# Altium PCB MCORD_AFE.PCBDOC (part 3 of 3)
Units mil, origin at the board's own origin, x right, y up, seen from the top; angles counter-clockwise.
Board outline 2755.91 x 787.4 mil, 4 copper layers (TOP, G1, PWR, BOT), stack 58.685 mil thick; 135 components, 89 nets, 442 pads, 254 vias.
Unrouted connection lines stored in the file: 2.
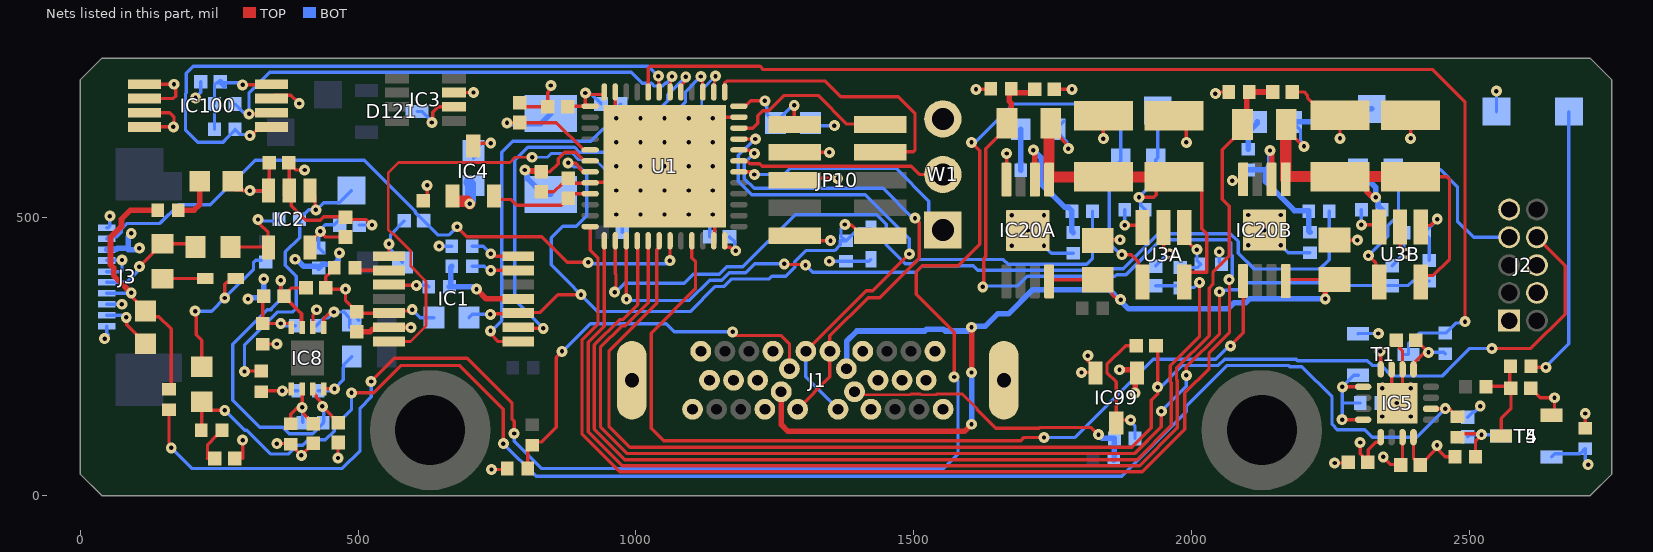
[diagram p4: the nets of this part, all layers, seen from the top]

## Via types
v1: diameter 19.68, hole 7.87, TOP to BOT, tented both sides, 254 vias

## Nets (pads, with @x,y where several pads share a name; then routed paths per layer and width w, separated by ;. In a path a pad name is that pad's centre, name@x,y a point inside that pad or via, vN(x,y) a via of type N, cw(c..) or ccw(c..) an arc to the next point about the centre after c; other vN are vias at no path point) (continued)
EN_HV1: IC20B.5 U1.21 | length 1621.4
  TOP w6: U1.21@1100.73,458.71 1100.73,428.36 1107.09,422 1107.09,372.57 1027.28,292.76 1027.28,121.52 1049.65,99.15 1692.51,99.15 1698.2,104.84 v1(1734.09,104.84) ; v1(2069.62,269.43) 2069.62,270.16 2092.36,292.9 IC20B.5@2092.36,386.36
  BOT w6: v1(1734.09,104.84) 1790,104.84 1930.53,245.38 2043.47,245.38 2067.53,269.43 v1(2069.62,269.43)
GND: C1.1 C2.1 C3.1 C4.1 C5.1 C6.1 C16.1 C26.1 C42.1 C43.1 C44.1 C45.1 C46.1 C48.1 C49.1 C54.1 C92.1 C93.1 C94.1 C95.1 C97.1 C98.1 C101.1 C130A.1 C130B.1 C131A.1 C131B.1 C132A.1 C132B.1 C133A.1 C133B.1 C134A.1 C134B.1 C284.1 C285.1 C286.1 C290.1 C291.1 C292.1 D121.3 IC1.1 IC1.5 IC2.2 IC3.2 IC4.3 IC5.7 IC5.14 IC5.15 IC5.17 IC8.6 IC20A.4 IC20A.9 IC20B.4 IC20B.9 IC99.3 IC100.1 IC100.2 IC100.3 IC100.4 IC100.7 J1.A1 J1.A12 J1.B1 J1.B12 J1.G1 J1.G2 J1.G3 J1.G4 J1.G5 J1.G6 J1.SHIELD J2.1 J2.4 J2.6 J3.1 J3.4 J3.5 J3.8 J3.9 J3.10 JP10.3 JP10.5 JP10.9 R3.1 R5.1 R6.1 R18.1 R19.1 R63.2 R67.2 R86A.1 R86B.1 R88A.2 R88B.2 R105.1 R107.1 R154A.1 R154B.1 T1.2 T4.2 T5.2 TP44.1 U1.8 U1.23 U1.35 U1.47 U1.49 U3A.2 U3B.2 W1.3 | length 4813
  TOP w6: v1(83,321) 83.93,320.07 83.93,307.29 C95.1@117.74,273.48 ; IC100.4@115.83,663.61 v1(167.81,663.61) 168.98,664.78 168.98,681.15 160.92,689.2 IC100.3@115.83,689.2 ; IC100.2@115.83,714.8 167.81,714.8 171.92,718.91 v1@171.92,731.75 ; IC100.1@115.83,740.39 v1(168.98,740.39) ; 291.79,67 292.44,67.65 v1(292.44,100) ; R107.1@328.79,272.82 328.94,272.97 v1(353.99,272.97) ; IC100.7@344.17,714.8 350.03,720.65 379.35,720.65 v1(394.26,705.74) ; v1(353.99,93.87) 376.7,93.87 378.57,92 R105.1@379.11,92.54 379.11,91.65 384.68,86.08 v1(398,72.76) C97.1@419.11,93.87 ; v1(404,586) 388.7,586 C98.1@375.61,599.09 376.39,598.31 IC2.2@376.39,548.9 380.06,545.23 380.06,521.76 406.21,495.61 431.99,495.61 438.14,501.77 C44.1@468.39,501.77 ; IC8.6@418.95,302.63 418.95,324.35 425.58,330.98 v1(425.58,334.68) v1@428.2,337.3 ; C93.1@441.9,373.92 441.9,394.4 445.41,397.92 446.2,397.92 457.5,409.21 R6.1@457.5,410 ; C93.1@442,367 446.74,371.74 v1(477.53,371.74) 477.53,351.18 C2.1@498,330.72 500.07,328.65 IC1.5@555.86,328.65 559.51,332.3 594.98,332.3 v1(597.6,334.91) ; v1(464.03,67.92) 464.03,95.25 C94.1@464.23,95.44 ; C44.1@477.53,501.02 481.55,497 515.26,497 v1(525.21,487.05) ; IC1.1@555.86,431.01 v1(555.86,453.27) ; C42.1@617,530.72 624.51,538.23 v1(624.51,558.39) ; v1(632.82,671.49) 634.64,673.31 634.64,690.33 644.13,699.82 IC3.2@672.36,699.82 ; IC4.3@707.33,629.54 711.69,633.9 738.17,633.9 v1(738.79,634.52) ; v1(740.24,47.15) R19.1@760.78,47.15 ; R19.1@768.41,49.08 R19.1@768.41,49.87 ; C4.1@793.67,709.69 C4.1@790.91,706.92 798.05,699.78 C292.1@841.54,699.78 841.54,725.6 844.38,728.44 844.38,735.38 v1(847,738) ; C26.1@829.47,547.1 852.56,547.1 867.09,561.64 868.8,561.64 C16.1@878,570.84 886.83,562.01 903.09,562.01 903.38,562.3 916.93,562.3 U1.8@917.66,563.04 918.35,563.73 944.83,563.73 U1.49@973.66,592.57 ; U1.47@962.94,726.43 962.94,681.15 v1(964.91,679.18) v1(1008.21,635.87) v1(1051.52,592.57) ; U1.49@969.28,588.19 U1.49@973.66,592.57 ; U1.23@1140.1,458.71 1140.84,459.44 1140.84,472.99 1141.81,473.96 1141.81,502.28 v1(1138.13,505.95) v1(1094.83,549.26) v1(1051.52,592.57) ; U1.35@1185.38,681.15 1140.1,681.15 v1(1094.83,635.87) v1(1051.52,592.57) ; JP10.9@1285.69,467.84 1289.45,471.61 1302.06,459 v1(1350,459) ; JP10.5@1285.69,567.84 1288.8,570.96 v1(1362.81,570.96) ; JP10.3@1285.69,617.84 v1(1347.96,617.84) ; v1(1611.86,731.11) 1636.99,731.11 R154A.1@1638.21,732.33 ; IC20A.4@1666.57,568.8 1667.01,569.24 v1(1667.01,615.67) ; C134A.1@1752.97,731.11 v1(1784.46,731.11) ; C130A.1@1795.65,691.09 1802.95,683.79 C130A.1@1840.96,683.79 v1(1840.96,642.45) ; C132A.1@1830.96,459.35 1832.61,461 1833,460.61 v1(1870.84,460.61) ; v1(1890.01,136.31) 1869.58,136.31 IC99.3@1864,130.72 1864,204.67 1847.39,221.28 1847.39,236.17 1881.07,269.84 C3.1@1900.21,269.84 ; U3A.2@1948.96,482.67 1949.59,482.04 1949.59,445.69 v1(1959.85,435.43) ; C131A.1@1967.96,683.79 1990.37,661.38 v1(1990.37,635.87) ; v1(2042.61,723.41) 2042.61,722.72 2046.31,726.43 R154B.1@2066.65,726.43 ; v1(2073,567) 2089.93,567 IC20B.4@2092.36,569.43 ; C134B.1@2180.79,726.43 2201.99,726.43 2208.11,720.3 2208.11,716.48 2240.17,684.42 C130B.1@2266.75,684.42 v1(2266.75,643.08) ; C132B.1@2256.75,459.98 2256.89,459.84 v1(2297.98,459.84) ; v1(2257,59) 2279.96,59 C101.1@2281.15,60.19 ; v1(2344.54,69.97) 2358.32,56.19 2375.14,56.19 C46.1@2376.01,55.32 2379.26,58.57 IC5.7@2379.26,105.41 ; IC5.15@2359.58,227.45 2359.58,176.27 IC5.17@2369.42,166.43 2379.26,176.27 IC5.14@2379.26,227.45 2379.26,260.39 2374.5,265.15 C48.1@2374.5,285.39 ; U3B.2@2374.75,483.3 2375.38,482.67 2375.38,446.32 v1(2385.64,436.05) ; v1(2393.75,643.08) C131B.1@2393.75,684.42 ; C45.1@2609.72,193.72 2627.16,176.27 v1(2652.58,176.27) 2652.58,150.11 T4.2@2647.25,144.78 ; v1(2708,148) 2708,121.75 R63.2@2708.21,121.54 ; U1.49@973.66,592.57 v1(1008.21,592.57) v1(1051.52,592.57)
  BOT w6: v1(44.13,282.58) 44.13,283.09 50.41,289.37 47.69,292.09 J3.10@47.69,305.12 ; J3.9@47.69,324.8 75.5,324.8 79.3,321 v1(83,321) ; J3.8@47.69,344.49 v1(75.16,344.49) ; J3.5@47.69,403.15 73.23,403.15 75.5,405.41 v1(75.5,424.25) 74.98,423.74 48.21,423.74 J3.4@47.69,423.23 ; J3.1@47.69,482.28 50.69,482.28 53.6,485.19 v1(53.6,502.95) ; v1(207.55,716) 207.55,716.61 216.78,725.84 C284.1@216.78,745.19 ; C92.1@502.24,487.05 v1(525.21,487.05) ; C6.1@579.89,419.85 579.89,420.83 558.48,442.25 558.48,450.65 v1(555.86,453.27) 558.48,455.89 558.48,469.81 C5.1@583.05,494.38 ; v1(597.6,334.91) 612.11,320.4 C1.1@636.55,320.4 ; D121.3@606.06,691.46 614.91,691.46 632.82,673.55 v1(632.82,671.49) ; v1(645.84,449) R3.1@668.5,449 ; C285.1@707.69,607.44 716.89,616.65 716.89,628.89 722.52,634.52 v1(738.79,634.52) ; v1@962.45,635.87 v1(964.91,635.87) ; v1(964.91,505.95) 964.91,505.77 975.1,495.57 C43.1@975.1,474.36 ; v1(964.91,679.18) 964.91,697.11 C291.1@972.62,704.82 ; C290.1@1132.88,466.1 1132.88,497 1138.13,502.25 v1(1138.13,505.95) ; v1(1138.13,679.18) v1@1141.81,679.18 ; C286.1@1314.06,670.53 1314.54,671 1319.66,665.87 v1(1356.93,665.87) ; v1(1734.09,450.1) 1747.63,436.57 R86A.1@1786.96,436.57 ; v1(1890.01,136.31) 1890.01,132.6 1897.96,124.65 R18.1@1897.96,103.03 ; C133A.1@1934.96,413.38 1935.16,413.38 1946.13,424.35 1946.13,424.55 1957.01,435.43 v1(1959.85,435.43) ; v1(2049.5,439) 2049.5,420.17 R88A.2@2053.56,416.12 ; v1(2159.88,450.73) 2173.42,437.2 R86B.1@2212.75,437.2 ; T1.2@2299.26,291.55 2299.68,291.96 v1(2335.84,291.96) ; v1(2342.99,142.65) v1(2342.99,193.72) ; C133B.1@2360.75,414.01 2360.95,414.01 2371.92,424.98 2371.92,425.18 2382.8,436.05 v1(2385.64,436.05) 2385.64,439.76 2381.84,443.56 R88B.2@2381.84,472.87 ; C49.1@2496.23,141.42 2505.43,150.62 2508.46,150.62 v1(2518.99,161.16) ; TP44.1@2548.14,691.09 v1(2548.14,727.91) ; T5.2@2647.25,69.97 2652.94,75.67 2698.56,75.67 2707.42,84.53 R67.2@2708.21,84.53 2708.21,64.5 2713.01,59.7 v1(2713.01,56)
  other v1: 2393.99,142.65 2368.97,166.88 2393.99,193.72 1675.83,450.1 2101.61,450.73 1704.96,477.27 2130.75,477.9 1675.83,504.43 1734.09,504.43 1008.21,505.95 1051.52,505.95 1094.83,505.95 2101.61,505.06 2159.88,505.06 964.91,549.26 1008.21,549.26 1051.52,549.26 1138.13,549.26 964.91,592.57 1094.83,592.57 1138.13,592.57 1051.52,635.87 1138.13,635.87 1008.21,679.18 1051.52,679.18 1094.83,679.18
I_SIPM_MEAS0: C133A.2 R68A.2 U1.16 | length 1825.4
  TOP w6: U1.16@1002.31,458.71 1003.04,457.98 1003.04,343.99 976.05,317 970.79,317 925.13,271.34 925.13,120 980.12,65 1901.55,65 1963.12,126.56 1963.12,203.2 1961.52,204.79 1961.52,234.16 2014,286.63 v1(2014,384)
  BOT w6: C133A.2@1934.96,377.55 1975.57,377.55 R68A.2@1979.39,373.73 1980.29,374.63 2003.64,374.63 2013.01,384 v1(2014,384)
I_SIPM_MEAS1: C133B.2 R68B.2 U1.17 | length 2097.4
  TOP w6: U1.17@1021.99,458.71 1021.99,347.39 980.61,306 975.34,306 936.13,266.78 936.13,124.55 984.68,76 1897,76 1945.27,124.28 v1(1945.27,152) ; v1(1990.37,216.54) 1990.37,231.7 2050,291.33 v1(2050,367)
  BOT w6: v1(1945.27,152) 1990.37,197.09 v1(1990.37,216.54) ; v1(2050,367) 2052.62,369.62 2064.75,369.62 2066.06,370.92 2084.76,370.92 2096.82,382.99 2274.9,382.99 2279.49,378.39 2360.75,378.39 2389.81,378.39 2397.78,386.36 R68B.2@2427.36,386.36
NetC4_2: C4.2 Q1.1 U1.5 | length 310.9
  TOP w6: C4.2@790.91,671.49 799,663.39 C4.2@791.39,671 ; U1.5@917.66,622.09 905.79,622.09 856.89,671 C4.2@791.39,671 ; C4.2@791.39,671 v1(768,671) C4.2@791.39,671
  TOP w10: C4.2@790.91,671.49 C4.2@796.5,677.09
  BOT w10: v1(768,671) 769.85,669.15 828.4,669.15 Q1.1@847,687.75
NetC26_2: C26.2 Q1.2 U1.6 | length 216.6
  TOP w6: C26.2@829.47,582.54 845.12,582.54 860.16,597.58 860.16,606.39 871.61,617.84 891.4,617.84 906.83,602.41 U1.6@917.66,602.41
  TOP w10: v1(800.08,586) 801.81,584.27 827.74,584.27 C26.2@829.47,582.54
  BOT w10: v1(800.08,586) 800.08,583.38 804.76,578.7 804.76,570.54 833.22,542.08 Q1.2@847,542.08
NetC44_2: C44.2 C92.2 IC2.5 L1.1 | length 165.9
  TOP w6: IC2.5@413.8,446.54 413.8,456.38 432.39,474.98 v1(432.39,475.77) ; v1@432.39,473.91 440.76,465.55 C44.2@468.39,465.55
  BOT w6: L1.1@438.61,436.71 438.61,437.1 429.79,445.92 L1.1@429.4,445.92 429.4,469.07 432.39,472.06 v1(432.39,475.77) 432.39,479.47 440.72,487.8 457.39,487.8 C92.2@466.59,497
NetC45_2: C45.2 R7.1 R110.1 T4.3 | length 177.3
  TOP w6: R110.1@2529.5,195.96 2530.29,196.75 C45.2@2572.23,196.75 ; T4.3@2556.7,107.38 2556.7,139 2574.28,156.59 C45.2@2574.28,193.72 2572.23,195.77 2572.23,231.74 R7.1@2573.5,233
NetC49_2: C49.2 R8.1 R66.1 T5.3 | length 153.7
  TOP w6: R66.1@2478.12,105.2 2484.39,111.47 2519.56,111.47 v1(2521.18,109.85) 2510.57,99.24 2510.57,70.07 R8.1@2510.5,70
  BOT w6: C49.2@2496.23,105.99 2500.09,109.85 v1(2521.18,109.85) 2554.22,109.85 T5.3@2556.7,107.38
NetC54_2: C54.2 R71.1 | length 62.5
  TOP w6: 228.8,67 229.24,67.44 229.24,92.17 245.97,108.91 246.76,108.91 255.17,117.32 R71.1@255.17,118.11
NetC93_2: C93.2 C94.2 IC8.3 IC8.7 L6.1 R46.2 R49.2 | length 782.1
  TOP w6: v1(361,387.58) 361,359.11 R46.2@366.98,353.13 ; R46.2@366.98,359.07 366.98,355.05 370.22,355.05 R46.2@375.4,349.87 ; 395.79,329.48 R46.2@375.4,349.87 ; 397.35,322.76 397.35,304.55 IC8.7@399.27,302.63 399.27,322.76 ; 397.38,324.65 399.27,322.76 ; C93.2@406.46,373.92 381.05,373.92 373.68,366.56 373.68,351.59 R46.2@375.4,349.87 ; IC8.3@418.95,192.39 418.95,185.5 420.87,183.58 421.2,183.58 424.72,180.07 424.72,176.85 v1@438.28,163.29 ; v1(435.77,160.77) 453.05,143.49 453.05,142.64 464.03,131.66 C94.2@464.23,131.66 ; R46.2@375.4,349.87 375.94,349.87 378.59,347.22 379.61,346.2 381.66,344.15 388.88,336.93 390.01,335.8 392.49,333.32 393.6,332.21 396.06,329.75 399.27,326.54 399.27,322.76
  BOT w6: v1(361,387.58) 361,364.27 L6.1@366.59,358.68 ; L6.1@366.59,359.07 L6.1@366.59,358.68 ; v1(435.77,160.77) 435.77,157.07 438.61,154.24 438.61,133.44 437.61,132.45 R49.2@437.61,131.66 437.61,130.88 418.2,111.46 376.32,111.46 364.8,122.97 322.92,122.97 274.47,171.43 274.47,272.82 336.45,334.81 344.27,334.81 344.27,336.36 L6.1@366.59,358.68
NetC96_1: C96.1 C98.2 IC2.3 R106.1 | length 163.3
  TOP w6: C96.1@274.47,565.94 274.47,553.13 277.35,550.24 292.44,550.24 293.68,549 v1(305.53,549) 338.89,549 IC2.3@338.99,548.9 340.17,550.08 C98.2@340.17,599.09
  BOT w6: v1(305.53,549) 338.89,549 R106.1@338.99,548.9
NetC96_2: C96.2 R104.2 | length 84.8
  TOP w10: R104.2@176.83,513.78 205.17,513.78 215.41,524.01 C96.2@215.41,565.94
NetC97_2: C97.2 IC8.2 R49.1 R105.2 | length 141.4
  TOP w6: R105.2@379.11,129.55 379.11,146.87 388.78,156.54 396.81,156.54 v1(399.42,159.16) ; IC8.2@399.27,192.39 399.42,192.24 v1(399.42,159.16) ; C97.2@419.11,130.09 418.91,130.09 407.94,141.07 407.94,141.26 402.04,147.16 402.04,156.54 v1(399.42,159.16)
  BOT w6: v1(399.42,159.16) 400.61,157.98 R49.1@400.61,131.66
NetC99_1: C99.1 IC5.10 R66.2 R71.2 | length 2780.2
  TOP w6: R71.2@218.17,118.11 218.95,118.9 C99.1@218.95,169.29 234.66,153.59 239.11,153.59 239.15,153.54 v1(260.29,153.54) ; v1(488.32,185.02) 528.31,185.02 577.67,234.38 682.46,234.38 761.39,155.44 v1(761.39,93.87) ; IC5.10@2430.44,156.59 v1(2456.03,156.59) 2463.74,156.59 2468.91,151.41 2468.91,150.62 2477.33,142.21 R66.2@2478.12,142.21
  BOT w6: v1(260.29,153.54) 295.99,117.84 299.83,117.84 342.46,75.22 375.22,75.22 390.61,90.6 401,90.6 410.86,100.46 441.34,100.46 457.03,116.15 457.03,124.57 488.32,155.86 v1(488.32,185.02) ; v1(761.39,93.87) 820.35,34.91 1874.29,34.91 1990.37,150.98 1990.37,161.16 2063.59,234.38 2174.14,234.38 2176.57,231.95 2198.11,231.95 2252.33,177.72 2252.33,128.65 2261.95,119.04 2311.05,119.04 2324.68,105.41 2404.85,105.41 v1(2456.03,156.59)
NetC99_2: C99.2 D2.2 R51.1 | length 315.6
  TOP w6: v1@209.11,330.61 209.11,289.28 218.95,279.43 C99.2@218.95,232.28 ; v1(260.29,355.85) 260.29,380.63 263.81,384.14 273.15,384.14 D2.2@279.99,390.98
  BOT w6: v1(207,332) 236.44,332 v1(260.29,355.85) 312,407.56 312,420 316,424 R51.1@326,424
NetC130A_2: C130A.2 C131A.2 IC20A.1 R85A.2 R94A.2 R152A.2 R153A.2 TP5A.1 U3A.5 | length 968.5
  TOP w6: R94A.2@1738.52,668.31 1753.23,653.6 1754.45,653.6 1777.97,630.08 v1(1777.97,624.54) ; v1(1905,537) 1931.41,537 1935.9,541.49 1935.9,549.98 1959.47,573.55 C131A.2@1967.96,573.55 1994.53,573.55 2018.11,549.98 2018.11,480.37 2027.16,471.32 2027.16,401.84 1999.8,401.84 1986.36,388.4 U3A.5@1986.36,384.24
  TOP w20: IC20A.1@1743.35,568.8 IC20A.1@1743.35,572.41 ; R94A.2@1746.46,651.27 1743.35,648.16 IC20A.1@1743.35,572.41 ; C131A.2@1959.47,573.55 C130A.2@1840.96,573.55 1744.49,573.55 IC20A.1@1743.35,572.41
  BOT w6: R153A.2@1769.55,673.57 R153A.2@1755.27,659.28 1755.27,657.31 1775.35,637.23 1775.35,627.16 v1(1777.97,624.54) ; R85A.2@1916.46,514.27 1908.05,522.68 1908.05,530.25 1905,533.3 v1(1905,537) 1935.45,567.45 R152A.2@1935.45,604.72 1939,608.27 TP5A.1@1939,693
NetC130B_2: C130B.2 C131B.2 IC20B.1 R85B.2 R94B.2 R152B.2 R153B.2 TP5B.1 U3B.5 | length 1005.4
  TOP w6: R94B.2@2162.24,667.84 2162.24,665.87 2176.96,651.16 2178.17,651.16 v1@2203.76,625.57 ; C131B.2@2393.75,574.18 2458.36,574.18 2463.74,568.8 2463.74,425.86 2434,396.12 2421.95,396.12 2412.15,386.33 U3B.5@2412.15,384.87
  TOP w10: C130B.2@2266.75,574.18 2293.32,574.18 2314.9,552.61 2314.9,547.7 2323.75,538.85 2329.15,538.85 v1(2331,537)
  TOP w20: IC20B.1@2169.13,569.43 IC20B.1@2169.13,573.04 ; R94B.2@2172.24,651.9 2169.13,648.79 IC20B.1@2169.13,573.04 ; C130B.2@2266.75,574.18 2170.28,574.18 IC20B.1@2169.13,573.04 ; C130B.2@2293.32,574.18 C131B.2@2393.75,574.18
  BOT w6: R153B.2@2181.05,672.5 2195.77,657.78 2195.77,638.48 2201.88,632.37 v1(2201.88,628.67)
  BOT w10: R153B.2@2181.05,672.5 2225.16,672.5 2248.66,696 TP5B.1@2324,696 ; R152B.2@2299.26,586.69 2299.26,584.72 2311.98,572 2313.95,572 2331,554.95 v1(2331,537) 2331,534.38 2335.84,529.54 2335.84,521.31 R85B.2@2342.25,514.9
NetD2_1: D2.1 R29.1 | length 77.2
  TOP w6: R29.1@148,390.28 148.71,390.98 D2.1@224.87,390.98
NetIC1_2: IC1.2 R6.2 | length 63.3
  TOP w6: R6.2@494.5,410 499.09,405.42 IC1.2@555.86,405.42
NetIC1_3: IC1.3 R4.1 | length 73.6
  TOP w6: IC1.3@555.86,379.83 557.15,378.54 v1(604.98,378.54)
  BOT w6: v1(604.98,378.54) 605.43,378.98 624.51,378.98 R4.1@627.5,376
NetIC1_13: IC1.13 R2.1 | length 85.8
  TOP w6: v1(738.79,405.42) IC1.13@788.14,405.42
  BOT w6: R2.1@705.5,413 727.5,413 735.08,405.42 v1(738.79,405.42)
NetIC1_14: IC1.14 R3.2 | length 90.1
  TOP w6: v1(738.79,435.43) 742.49,435.43 746.91,431.01 IC1.14@788.14,431.01
  BOT w6: R3.2@705.5,449 725.22,449 v1(738.79,435.43)
NetIC2_1: IC2.1 R47.1 R101.2 TP4.1 | length 532.2
  TOP w6: v1(295.73,223.54) 296.51,224.33 R47.1@326.11,224.33 ; IC2.1@413.8,548.9 422.61,540.09 422.61,516.02 v1(424.18,514.45)
  BOT w6: v1(295.73,223.54) 295.73,270.7 355.64,330.61 382.93,330.61 388.8,336.49 388.8,394.96 369.16,414.61 369.16,438.63 394.9,464.37 R101.2@394.9,497.72 394.9,498.5 403.31,506.92 404.1,506.92 411.63,514.45 v1(424.18,514.45) 425.21,514.45 438.02,527.26 466.32,527.26 TP4.1@488.32,549.26
NetIC2_4: IC2.4 R101.1 R102.2 | length 166
  TOP w6: R102.2@270.54,447.44 IC2.4@338.09,447.44 ; v1(320.13,497) 322.75,494.38 322.75,489.25 338.09,473.91 IC2.4@338.09,447.44 ; IC2.4@338.99,446.54 338.39,447.13 IC2.4@338.09,447.44
  BOT w6: v1(320.13,497) 322.75,494.38 354.55,494.38 R101.1@357.89,497.72
NetIC5_1: IC5.1 IC5.4 R5.2 T1.1 | length 204
  TOP w6: v1(2270.53,136.88) IC5.4@2308.39,136.9 ; v1(2270.99,195.96) IC5.1@2308.39,195.96
  BOT w6: v1(2270.53,136.88) 2270.76,137.11 2270.76,166.42 ; T1.1@2299.26,216.74 2291.39,216.74 2270.99,196.35 v1(2270.99,195.96) 2270.76,195.73 2270.76,166.42 ; R5.2@2302.96,166.88 2271.22,166.88 2270.76,166.42
NetIC8_1: IC8.1 R45.1 R47.2 | length 84.2
  TOP w6: R47.2@326.11,187.32 327.6,188.81 v1(364.01,188.81) 377.66,188.81 379.58,190.73 IC8.1@379.58,192.39
  BOT w6: v1(364.01,188.81) R45.1@391.59,188.81
NetIC8_4: IC8.4 R45.2 R48.1 | length 120.7
  TOP w6: IC8.4@438.64,192.39 v1(457.73,192.39)
  BOT w6: R45.2@428.61,188.82 450.46,188.82 454.03,192.39 v1(457.73,192.39) 473.61,208.27 473.61,230.32 474.2,230.91 474.2,235.8 R48.1@488.91,250.52
NetIC8_5: IC8.5 R50.2 R103.1 | length 133.9
  TOP w6: IC8.5@438.64,302.63 438.64,318.64 450.61,330.61 v1(456.53,330.61)
  BOT w6: R50.2@424.61,305.82 438.98,320.19 446.11,320.19 v1(456.53,330.61) ; v1@456.54,330.61 474.2,330.61 485.15,319.65 R103.1@485.15,303.26 ; R103.1@499.6,317.48 R103.1@501.91,315.17
NetIC8_8: IC8.8 R46.1 R50.1 R107.2 | length 134.9
  TOP w6: R46.1@329.98,359.07 328.79,357.89 R107.2@328.79,309.83 v1(361,309.83) 377.66,309.83 379.58,307.91 IC8.8@379.58,302.63
  BOT w6: v1(361,309.83) 363.18,309.83 367.19,305.82 R50.1@387.61,305.82
NetIC20A_2: IC20A.2 R11A.1 R86A.2 R87A.2 | length 237.9
  TOP w10: v1(1714.96,621.74) 1714.96,619.12 1717.75,616.32 IC20A.2@1717.75,568.8
  BOT w10: v1@1713.41,620.19 v1(1714.96,621.74) 1729.28,607.42 R11A.1@1729.28,586 1729.28,561.32 1771.79,518.8 1778.04,518.8 1784.46,512.39 R87A.2@1784.46,511.6 1784.46,476.08 R86A.2@1786.96,473.57
NetIC20B_2: IC20B.2 R11B.1 R86B.2 R87B.2 | length 282.1
  TOP w10: v1(2140.75,621.06) 2140.75,619.75 2143.54,616.95 IC20B.2@2143.54,569.43
  BOT w10: R11B.1@2101.61,586.21 2132.31,586.21 ; v1(2140.75,621.06) 2140.75,594.65 2132.31,586.21 ; R86B.2@2212.75,474.2 2210.24,476.71 R87B.2@2210.24,512.23 2210.24,513.02 2184.64,513.02 2132.31,565.35 2132.31,586.21
NetJ1_A5: J1.A5 R13.2 R18.2 | length 546.5
  TOP w5: J1.A5@1393.29,187.17 1398.59,181.87 1431.87,181.87 1432.1,181.63 1451.91,181.63 1452.14,181.87 1471.71,181.87 1471.95,181.63 1493.18,181.63 1494.67,183.13 1512.02,183.13 1513.51,181.63 1539.78,181.63 1541.27,183.13 1587.15,183.13 1614.25,156.02 1614.25,154.57
  TOP w6: 1614.25,154.57 1647.3,121.52 1725.54,121.52 1726.7,122.69 1819.32,122.69 v1(1832.16,109.85)
  BOT w10: v1(1832.16,109.85) 1838.92,103.09 R18.2@1860.95,103.03 R18.2@1860.95,103.03 1860.21,102.29 1860.21,64.88 R13.2@1859.46,64.13
NetJ1_B5: J1.B5 R12.2 R19.2 | length 721.9
  TOP w6: R19.2@805.42,49.08 R12.2@805.42,84.68 ; R12.2@813.15,90.91 818.97,96.73 830.84,96.73 856.96,122.85 856.96,187.14 856.44,187.65 856.44,248.88 867.09,259.53 v1(867.09,259.75) ; v1(1174,295) 1180.73,288.27 1261.4,288.27 1276.17,273.51 J1.B5@1276.17,228.5
  BOT w6: v1@868.8,260 918.2,309.4 1054.62,309.4 1069.02,295 v1(1174,295)
NetR1_1: R1.1 T1.3 U1.44 | length 2081.6
  TOP w6: U1.44@1021.99,726.43 1021.99,769.32 1025.51,772.84 1223.25,772.84 1229.25,766.84 2434,766.84 2491.59,709.26 v1(2491.59,313.36)
  BOT w6: T1.3@2381.94,254.14 T1.3@2389.81,254.14 2389.81,273.34 2409.21,292.74 R1.1@2456.03,292.74 2456.82,292.74 2474.82,310.75 2488.97,310.75 v1(2491.59,313.36)
NetR11A_2: R11A.2 R153A.1 | length 73.3
  BOT w10: R11A.2@1692.27,586 R153A.1@1692.27,659.28
NetR11B_2: R11B.2 R153B.1 | length 56.1
  BOT w10: R11B.2@2101.61,623.22 2101.61,654.08 2118.06,670.53 R153B.1@2118.06,672.5
NetR44_2: R44.2 R152A.1 U3A.4 | length 3095.5
  TOP w6: R44.2@159.9,154.72 159.9,93.86 164,89.75 v1(164,86.05) ; v1(523.68,205.62) 565.57,247.51 696.11,247.51 777.2,166.42 777.2,137.85 781,134.04 v1(781,112) ; v1(1572.5,213.74) 1572.5,294.36 1504.51,362.35 1504.51,403.32 1515.15,413.97 1580.2,413.97 1618.63,452.39 1618.63,621.05 v1(1603.8,635.87) ; v1(1874.34,433.86) 1891.49,433.86 1904.13,421.23 1904.13,391.68 U3A.4@1911.56,384.24
  BOT w6: v1(164,86.05) 200.97,49.08 471.84,49.08 503.65,80.89 503.65,157.68 523.68,177.71 v1(523.68,205.62) ; v1(781,112) 781.32,111.68 781.32,97.68 829.92,49.08 1554.1,49.08 1579.44,74.42 1579.44,206.8 v1(1572.5,213.74) ; v1(1603.8,635.87) 1606.42,638.49 1613.42,638.49 1679.74,704.82 1827.61,704.82 1872.46,659.98 R152A.1@1872.46,604.72 1872.46,602.75 1851.74,582.03 1851.74,454.03 1871.9,433.86 v1(1874.34,433.86)
NetR68A_1: R68A.1 R88A.1 U3A.1 | length 119.5
  TOP w6: U3A.1@1986.36,482.67 1986.36,463.97 2007.57,442.76 v1(2009.32,442.76)
  BOT w6: R68A.1@1979.39,410.74 2011.18,410.74 R88A.1@2016.55,416.12 2009.32,423.35 v1(2009.32,442.76)
NetR68B_1: R68B.1 R88B.1 U3B.1 | length 122.6
  TOP w6: U3B.1@2412.15,483.3 2415.19,486.34 2430.43,486.34 v1(2441.68,497.58)
  BOT w6: R68B.1@2427.36,423.37 2427.36,463.57 2418.84,472.09 R88B.1@2418.84,472.87 2418.84,473.66 2427.26,482.08 2441.68,496.5 v1(2441.68,497.58)
NetR85A_1: R85A.1 U3A.3 | length 61.3
  TOP w6: v1(1879.46,486.69) 1907.54,486.69 U3A.3@1911.56,482.67
  BOT w6: v1(1879.46,486.69) R85A.1@1879.46,514.27
NetR85B_1: R85B.1 U3B.3 | length 61.3
  TOP w6: v1(2305.24,487.32) 2333.32,487.32 U3B.3@2337.35,483.3
  BOT w6: v1(2305.24,487.32) R85B.1@2305.24,514.9
P3V3: C46.2 C48.2 C101.2 C284.2 C286.2 C290.2 C291.2 C292.2 D1.1 IC3.3 IC5.5 IC5.8 IC5.13 IC5.16 IC99.2 IC100.8 JP10.1 R1.2 R7.2 R8.2 R422.2 R425.2 R430.1 TP3.1 U1.1 U1.24 U1.36 U1.48 | length 1615.1
  TOP w6: v1(292.44,739.3) 343.08,739.3 IC100.8@344.17,740.39 ; IC3.3@672.36,725.41 v1(707.69,725.41) ; C292.2@878,699.78 879.05,700.83 U1.1@914.78,700.83 ; U1.1@917.66,700.83 U1.1@914.78,700.83 ; U1.48@943.25,726.43 943.25,723.78 941.48,722 911.79,722 v1(909.09,724.71) 909.09,706.52 U1.1@914.78,700.83 ; U1.24@1159.79,458.71 1159.79,448.92 1161.56,447.15 1169.59,447.15 1175.9,440.84 v1(1179.6,440.84) ; U1.36@1185.38,700.83 1197.05,700.83 1206.75,710.54 v1(1231.87,710.54) ; v1(1284.85,702.33) 1284.85,671.05 1286.87,669.03 JP10.1@1285.69,667.84 ; v1(1801.74,221.69) 1826.18,221.69 IC99.2@1826.6,221.28 1826.6,229.15 1810.8,244.94 1810.8,249.8 v1(1813,252) ; v1(2302.96,95.7) 2302.96,75.62 2317.88,60.7 C101.2@2317.37,60.19 ; C101.2@2316.98,60.19 C101.2@2317.37,60.19 ; v1(2339,260) 2339.89,259.11 IC5.16@2339.89,227.45 ; IC5.5@2339.89,105.41 2339.89,99.12 2337.21,96.44 2330.92,96.44 2317.37,82.89 C101.2@2317.37,60.19 ; IC5.8@2398.95,105.41 2398.95,67.82 C46.2@2411.44,55.32 2441.14,85.02 2443.15,85.02 2443.76,84.41 2443.76,82.4 2456.16,70 R8.2@2473.5,70 ; IC5.13@2398.95,227.45 2398.95,237.88 2419.71,258.65 2419.71,263.65 C48.2@2403.35,280 ; R7.2@2610.5,233 2612.5,231 v1(2637,231)
  BOT w6: R422.2@241.79,659.28 R425.2@241.79,697.67 ; R425.2@241.79,704.82 241.79,739.5 245.49,743.2 v1@285.1,743.2 ; v1(909.09,724.71) 911.7,722.09 919.91,722.09 C291.2@937.18,704.82 ; C290.2@1168.31,466.1 1177.52,456.9 1177.52,442.92 v1(1179.6,440.84) ; v1(1231.87,710.54) 1231.87,706.83 1235.37,703.33 1235.37,686.23 C286.2@1251.07,670.53 1251.07,671.51 1281.89,702.33 v1(1284.85,702.33) ; v1(1348.15,421.85) 1349.55,421.85 1349.7,421.7 R430.1@1377.95,421.7 1419.34,421.7 D1.1@1422.82,425.18 ; v1(2426,258) 2453.77,258 R1.2@2456.03,255.73 ; v1(2637,231) 2637,232.17 2678.16,273.34 2678.16,690.52 TP3.1@2678.74,691.09
  BOT w10: C284.2@252.21,745.19 C284.2@259.41,737.98
  other v1: 2441.14,90.73
P3V3REF: C16.2 IC4.2 U1.9 | length 185.4
  TOP w6: IC4.2@745.09,533.14 775.23,533.14 785.6,522.77 865.36,522.77 C16.2@878,535.41 885.95,543.35 U1.9@917.66,543.35
P5V0: C2.2 C285.2 IC1.6 IC1.11 IC4.1 IC99.1 J1.A4 J1.A9 J1.B4 J1.B9 J2.9 J3.3 L1.2 L6.2 R2.2 R4.2 | length 703.9
  TOP w10: C2.2@498,295.28 522.13,295.28 526.05,299.2 552,299.2 IC1.6@555.86,303.05 556.07,302.84 595.01,302.84 v1(595.22,302.63) ; v1(713.09,371.74) 713.22,371.74 730.72,354.24 IC1.11@788.14,354.24 ; v1(1870,226.75) 1893.61,226.75 1901.4,218.95 1901.4,215.63 1898.07,212.3 1898.07,184.83 v1(1897.96,184.72)
  TOP w20: IC4.1@669.93,538.99 669.93,532.59 672.73,529.79 696.62,529.79 v1(701.05,525.36)
  BOT w10: J3.3@47.69,442.91 48.6,443.82 65.58,443.82 66.86,445.1 84.13,445.1 86.31,442.91 ; v1(92,472) 86.31,466.31 86.31,442.91 ; v1(106.75,445.47) 104.13,445.47 101.57,442.91 86.31,442.91 ; v1(302,354) 303.85,355.85 327.15,355.85 L6.2@330.37,359.07 v1(330.37,389.89) v1@329.22,388.74 ; v1(387,425.53) 389.62,425.53 402.2,412.96 426.14,412.96 L1.2@429.4,409.69 436.21,416.51 456.77,416.51 464.74,424.47 464.74,435.25 v1(466.59,437.1) ; R2.2@668.5,413 666.5,411 666.5,378 R4.2@664.5,376 706.21,376 710.47,371.74 v1(713.09,371.74)
  BOT w20: C285.2@699.6,563.93 C285.2@702.47,561.06 ; v1@702.47,529.62 C285.2@702.47,561.06 ; 702.47,535.47 C285.2@702.47,561.06
P70V0: C132A.2 C132B.2 IC20A.8 IC20B.8 J1.A8 J1.B8 | length 1837.4
  TOP w6: IC20A.8@1743.35,385.73 1746.1,388.49 C132A.2@1830.96,388.49 1836.86,388.49 1856.5,368.85 1856.5,362.94 v1@1867.24,352.21 ; v1@1867.85,352.82 v1(1872.19,352.82) ; IC20B.8@2169.13,389.12 C132B.2@2256.75,389.12
  TOP w10: J1.A8@1261.4,187.17 1261.4,127.85 1273.28,115.97 1591.13,115.97 v1(1603.8,128.65) ; v1(1603.8,221.69) v1(1603.8,303.19) ; v1(2240.17,354.14) 2240.17,372.54 C132B.2@2256.75,389.12
  BOT w10: J1.B8@1378.53,228.5 1379.35,229.33 1379.35,278.22 1397.55,296.42 1519.76,296.42 1523.05,299.7 1552.91,299.7 1556.19,296.42 1597.03,296.42 v1(1603.8,303.19) 1605.66,305.05 1628.56,305.05 1650.67,327.16 1670.2,327.16 1713.7,370.66 1851.79,370.66 1870.91,351.55 1886.3,336.16 2065.23,336.16 2076,346.92 2096.82,346.92 2104.04,354.14 v1(2240.17,354.14) ; v1(1603.8,128.65) v1(1603.8,221.69)
RESETn: C1.2 D1.2 IC1.10 JP10.10 R430.2 U1.7 | length 1297.4
  TOP w6: v1(738,326.26) 739.19,327.45 786.95,327.45 IC1.10@788.14,328.65 789.25,329.75 827.74,329.75 859.7,361.71 v1(901.2,361.71) ; v1(878,599) 879.05,597.95 891.6,597.95 899.2,590.35 899.2,588.16 902.72,584.65 903.87,584.65 905.79,582.72 U1.7@917.66,582.72 ; v1(1376,488) 1377.56,486.44 1388.35,486.44 1406.94,467.84 JP10.10@1439.23,467.84
  BOT w6: C1.2@699.55,320.4 705.41,326.26 v1(738,326.26) ; v1(878,599) 880.94,599 888.36,591.58 897.98,591.58 911.73,577.83 911.73,503.98 892.78,485.03 868.78,485.03 847.52,463.77 847.52,415.39 931.51,331.4 1097.91,331.4 1143.09,376.58 1159.11,376.58 1172.53,390 1239.73,390 1244.69,394.96 1269.71,394.96 1285.69,410.94 1285.69,420.92 1305.92,441.16 1357.39,441.16 1367.84,451.61 1367.84,458.71 R430.2@1377.23,458.71 ; v1@1374.55,484.3 1372.33,484.3 1368.81,480.78 1368.81,467.13 R430.2@1377.23,458.71 ; R430.2@1377.95,458.71 R430.2@1377.23,458.71 ; R430.2@1378.74,458.71 1400.33,480.3 D1.2@1422.82,480.3
Rx: U1.31 W1.2 | length 376.9
  TOP w6: U1.31@1185.38,602.41 1186.11,601.67 1200.68,601.67 1205.2,597.16 1222.75,597.16 1227.34,592.57 1495.59,592.57 1510.16,578 W1.2@1552.16,578
SCL1: IC100.6 R425.1 U1.42 | length 935.7
  TOP w6: v1(304,687) 341.97,687 IC100.6@344.17,689.2 ; U1.42@1061.36,726.43 1062.1,727.16 1062.1,747.59 1064.99,750.47 v1(1064.99,754.18)
  BOT w6: R425.1@278.8,704.82 278.8,704.03 293.21,689.62 301.38,689.62 v1(304,687) 304,689.62 304,724.88 340.87,761.75 991.93,761.75 1011.65,742.03 1028.05,742.03 1032.92,737.15 1047.7,737.15 1052.58,742.03 1054.46,742.03 1064.99,752.56 v1(1064.99,754.18)
SDA1: IC100.5 R422.1 U1.43 | length 1179.3
  TOP w6: v1(305.53,647.97) 307.86,647.97 323.5,663.61 IC100.5@344.17,663.61 ; v1(1040.31,755) 1041,754.32 1041,727.11 U1.43@1041.68,726.43
  BOT w6: R422.1@278.8,659.28 R422.1@278.8,658.5 ; v1(305.53,647.97) 303.42,650.08 287.21,650.08 R422.1@278.8,658.5 ; v1(1040.31,755) 1022.57,772.75 203.75,772.75 191,760 191,724.68 189.71,723.39 189.71,657.67 211.5,635.87 257.67,635.87 259.18,637.38 259.18,638.88 R422.1@278.8,658.5
SIPM_E_A: J3.6 R29.2 R102.1 | length 195.1
  TOP w6: v1(106.75,412.2) 131.32,436.76 131.32,438.55 146.04,453.27 R29.2@148,453.27 201.72,453.27 R102.1@207.55,447.44
  BOT w6: J3.6@47.69,383.86 83.63,383.86 102.03,402.26 102.03,403.78 106.75,408.49 v1(106.75,412.2)
SIPM_E_C: C95.2 J3.7 R44.1 R104.1 | length 485.9
  TOP w6: v1(92,365) 93.55,363.45 93.55,356.72 C95.2@117.74,332.54 128.1,322.18 141.93,322.18 164,300.1 164,195.84 R44.1@159.9,191.73
  TOP w10: v1(92,365) 60.46,396.54 60.46,409.81 54.65,415.62 54.65,465.13 74.44,484.92 74.44,497.67 90.55,513.78 R104.1@139.82,513.78
  BOT w6: J3.7@47.69,364.17 91.17,364.17 v1(92,365)
SIPM_VCC_EXT: J2.7 R152B.1 U3B.4 | length 532.1
  TOP w6: v1(2317.66,432.12) 2330.99,418.79 2330.99,391.24 U3B.4@2337.35,384.87
  BOT w6: v1(2317.66,432.12) 2353.1,467.55 2353.1,486.24 2371.92,505.06 2371.92,577.02 R152B.1@2362.25,586.69 2447.55,586.69 2478,556.23 2478,494 2507.04,464.96 J2.7@2571,464.96
SPI1_MOSI: IC1.8 U1.41 | length 821.9
  TOP w6: v1(738.43,296.81) 738.43,291.33 752.3,277.46 IC1.8@788.14,277.46 ; U1.41@1081.05,726.43 1081.05,738.29 1087.06,744.3 1087.06,751.01 v1(1089.67,753.63)
  BOT w6: v1(738.43,296.81) 740.24,296.81 758.61,315.17 758.61,618.27 778.18,637.84 918.88,637.84 940.92,659.88 1016.76,659.88 1033.68,676.8 1033.68,686.73 1057.49,710.54 1057.49,721.44 v1(1089.67,753.63)
SPI_NSS: IC1.7 U1.38 | length 1172.1
  TOP w5: IC1.7@555.86,277.46 594.58,277.46 622.32,305.2 622.32,385.72 594.8,413.24 594.8,440.07 564.26,470.61 562.8,470.61 554.25,479.16 554.25,580.67 573.19,599.6 773.15,599.6 782.55,609 v1(813.15,609) ; U1.38@1140.1,726.43 1141.03,727.35 1141.03,752.93 v1(1143.09,755)
  BOT w5: v1(813.15,609) 840.99,609 847.66,615.67 865.36,615.67 866.03,616.34 885.18,616.34 897.2,604.33 927.48,604.33 956.58,575.22 1058.7,575.22 1073.2,589.72 1073.2,595.47 1087.7,609.97 1102.79,609.97 1118.56,625.74 1118.56,730.46 v1(1143.09,755)
SPI_SCK: IC1.9 U1.39 | length 848.7
  TOP w6: IC1.9@788.14,303.05 789.9,301.29 v1(833.22,301.29) ; v1(1116.72,754.32) 1116.72,750.61 1119.68,747.65 1119.68,727.16 U1.39@1120.42,726.43
  BOT w6: v1(833.22,301.29) 782.24,352.28 782.24,603.32 805.76,626.84 889.53,626.84 898.34,618.03 1058.91,618.03 1076.98,636.11 1076.98,696.62 1089.25,708.89 1089.25,726.85 v1(1116.72,754.32)
SWCLK: JP10.4 U1.37 | length 531.9
  TOP w6: U1.37@1159.79,726.43 1159.79,742.6 1163.3,746.11 1340.59,746.11 1368.81,717.89 1471.95,717.89 1502.16,687.68 1502.16,622.32 1498.64,618.8 JP10.4@1421.26,618.8
SWDIO: JP10.2 U1.34 | length 289.4
  TOP w6: U1.34@1185.38,661.46 1210.62,661.46 1219.44,670.28 1219.44,683.8 1228.33,692.69 1239.26,692.69 1266.75,720.18 1327.86,720.18 1379.23,668.8 JP10.2@1421.26,668.8
TEMP_EXT: C3.2 J2.8 U1.18 | length 2503.2
  TOP w6: U1.18@1041.68,458.71 1041.68,446.84 1037.6,442.76 1037.6,345.92 951.43,259.75 951.43,124.8 989.24,87 1892.44,87 1927.43,121.99 1927.43,171.92 1938.63,183.13 v1(1938.63,195.44) 1938.63,266.85 C3.2@1935.64,269.84 ; v1(2540,265) 2610.19,265 2672,326.81 2672,413.96 J2.8@2621,464.96
  BOT w6: v1(1938.63,195.44) 1944.04,195.44 1982.98,234.38 2048.03,234.38 2059.03,245.38 2187.77,245.38 2190.19,242.95 2315.86,242.95 2324.43,234.38 2341.22,234.38 2360.15,215.45 2450.43,215.45 2471.29,236.32 2471.55,236.32 2476.24,241 2476.24,241.26 2499.98,265 v1(2540,265)
TEMP_LOCAL: C5.2 J3.2 U1.19 | length 1200.7
  TOP w6: v1(678.49,483.94) 678.49,483.51 695.84,466.16 830.35,466.16 876.51,420 v1(914,420) ; v1(1061,423) 1061.18,423.18 1061.18,458.53 U1.19@1061.36,458.71
  BOT w6: J3.2@47.69,462.6 50.6,465.5 65.3,465.5 74.16,474.36 74.16,479.39 84.61,489.84 143.76,489.84 177.41,523.49 234.49,523.49 314.84,603.84 511.35,603.84 603.25,511.94 603.25,509.61 C5.2@618.48,494.38 643.66,469.2 663.76,469.2 v1(678.49,483.94) ; v1@917.66,417.21 1057.49,417.21 1061,420.73 v1(1061,423)
Tx: U1.30 W1.1 | length 434.7
  TOP w6: U1.30@1185.38,582.72 1208.28,582.72 v1(1213,578)
  BOT w6: v1(1213,578) 1266.84,578 1277.64,588.8 1468.02,588.8 1526.57,530.25 1526.57,503.59 W1.1@1552.16,478
U_SIPM_ADJUST0: R87A.1 U1.14 | length 1165.4
  TOP w6: v1(961.72,366.21) 964.06,368.56 964.06,398.65 962.94,399.77 U1.14@962.94,458.71
  BOT w6: v1(961.72,366.21) 963.66,366.21 979.89,382.44 1086.72,382.44 1102.86,398.58 1150,398.58 1163.42,412 1192.61,412 1286.45,505.84 1433.2,505.84 1450.21,488.83 1450.21,451.56 1484.61,417.16 1499.39,417.16 1507.2,424.97 1661.12,424.97 1669.42,416.66 1810.7,416.66 1821.46,427.42 R87A.1@1821.46,511.6
U_SIPM_ADJUST1: R87B.1 U1.15 | length 1572.9
  TOP w6: U1.15@982.62,458.71 982.62,353.95 v1(982.95,353.62) ; v1(1266.84,417.33) 1268.01,416.17 1303.61,416.17 v1@1305,414.77
  BOT w6: v1(982.95,353.62) 985.2,351.38 1096.17,351.38 1132.38,387.58 1154.56,387.58 1167.97,401 1197.17,401 1213.5,417.33 v1(1266.84,417.33) ; v1(1305,415) 1317.72,402.28 1503.47,402.28 1515.15,413.97 1606.76,413.97 1615.06,405.66 1815.26,405.66 1818.28,408.69 1877.14,408.69 1940.07,471.61 2069.62,471.61 2083.77,457.45 2083.77,436.46 2112.27,407.96 2230.66,407.96 2247.25,424.55 R87B.1@2247.25,512.23
U_SIPM_MEAS0: C134A.2 R94A.1 R154A.2 U1.12 | length 2771.9
  TOP w6: U1.12@917.66,484.3 917.66,441.57 931.84,427.39 931.84,309.17 903.13,280.45 903.13,110.88 971.01,43 1910.67,43 1987.24,119.58 1987.24,184.92 2031.08,228.76 2031.08,256.85 2067.84,293.62 2067.84,388.27 v1(2067.35,388.77) ; v1(1624.01,375.87) 1624.01,377.85 1625.5,379.34 1625.5,426.43 1629.63,430.55 1629.63,624.18 R94A.1@1656.72,651.27
  TOP w10: R154A.2@1671.53,720.28 1671.53,709.9 1675.53,705.9 R94A.1@1675.53,670.28 ; R154A.2@1675.22,723.78 1676.22,724.78 C134A.2@1714.6,724.78
  BOT w6: v1(1624.01,375.87) 1625.56,377.42 1686.51,377.42 1703.76,394.66 1861.78,394.66 1864.8,397.69 1881.7,397.69 1944.62,460.61 2065.06,460.61 2070.29,455.38 2070.29,434.33 2072.98,431.63 2072.98,396.92 2067.35,391.29 v1(2067.35,388.77)
U_SIPM_MEAS1: C134B.2 R94B.1 R154B.2 U1.13 | length 2158.1
  TOP w6: U1.13@943.25,458.71 943.25,305.02 914.13,275.9 914.13,115.44 975.57,54 1906.11,54 1974.12,122.01 1974.12,207.76 1972.52,209.35 1972.52,229.6 2031.2,288.27 2031.2,373.43 2038.16,380.39 2038.16,402.42 2067.35,431.61 2067.35,521.09 2055.16,533.28 2055.16,622.76 2078.36,645.97 R94B.1@2078.36,651.9
  TOP w10: R94B.1@2099.25,667.84 2099.25,726.43 R154B.2@2103.65,726.43 C134B.2@2145.35,726.43
USB_D_N: J1.A7 J1.B7 U1.32 | length 860.6
  TOP w6: U1.32@1185.38,622.09 1186.11,621.36 1203.94,621.36 ; J1.A7@1290.93,155.67 1349,213.74 J1.B7@1349,260 1352,263 1349,266.01 1349,287.75 1417.68,356.43 1438.66,356.43 1509.84,427.61 1509.84,491.89 v1(1502.16,499.57)
  BOT w6: v1(1213,616) 1195.16,598.16 1195.16,570.61 1212.65,553.11 1444.54,553.11 1498.08,499.57 v1(1502.16,499.57)
USB_D_P: J1.A6 J1.B6 U1.33 | length 884.3
  TOP w6: U1.33@1185.38,641.78 v1@1214.87,641.78 ; J1.B6@1305.69,260 1414.54,368.85 1425.85,368.85 v1(1492,435)
  BOT w6: v1(1214.9,641.81) 1213.58,641.81 1184.16,612.39 1184.16,566.05 1208.37,541.84 1412.75,541.84 1492,462.59 v1(1492,435) ; J1.B6@1305.69,260 1305.69,213.74 J1.A6@1363.76,155.67
pads on no net: B1.1 B2.1 IC5.6 IC5.9 IC5.11 IC8.9 IC20A.3 IC20A.6 IC20A.7 IC20B.3 IC20B.6 IC20B.7 J3.MECH JP10.6 JP10.7 JP10.8 U1.2 U1.3 U1.4 U1.40
copper on no net:
  other v1: 409.11,227.83 409.11,267.2

## Polygon pours and split planes (outlines as drawn)
GND on G1 (split plane): 2735.81,739.71 2735.81,47.69 2708.21,20.1 47.69,20.1 20.1,47.69 20.1,739.71 47.69,767.3 2708.21,767.3
P5V0 on PWR (split plane): 2735.81,739.71 2735.81,47.69 2708.21,20.1 2215.34,20.1 2215.34,34.4 2214.95,36.35 2213.85,38 2212.2,39.11 2210.24,39.5 2208.29,39.11 2206.64,38 2205.53,36.35 2205.15,34.4 2205.15,20.1 47.69,20.1 20.1,47.69 20.1,739.71 47.69,767.3 265.05,767.3 265.05,677.14 265.44,675.19 266.55,673.54 301.88,638.21 303.53,637.1 305.48,636.71 619.22,636.71 762.9,493.03 762.9,394.17 763.29,392.22 764.4,390.57 826.57,328.4 828.22,327.29 830.17,326.9 1080.26,326.9 1082.21,327.29 1083.86,328.4 1092.85,337.39 1141.21,385.74 1579.11,385.74 1767.26,197.6 1768.91,196.49 1770.86,196.1 1819.18,196.1 1821.13,196.49 1822.79,197.6 1900.38,275.19 2226.31,275.19 2277.71,223.8 2277.71,93.59 2278.09,91.64 2279.2,89.99 2299.36,69.83 2301.01,68.72 2302.96,68.33 2634.03,68.33 2635.99,68.72 2637.64,69.83 2682.35,114.53 2683.45,116.19 2683.84,118.14 2683.84,216.59 2683.45,218.55 2682.35,220.2 2640.94,261.6 2639.29,262.71 2637.34,263.1 2540.54,263.1 2513.14,290.5 2513.14,767.3 2708.21,767.3
P3V3 on PWR (split plane): 2502.94,288.39 2503.33,286.44 2504.43,284.78 2534.82,254.4 2536.48,253.29 2538.43,252.9 2635.23,252.9 2673.64,214.48 2673.64,120.25 2631.92,78.53 2305.08,78.53 2287.9,95.7 2287.9,225.91 2287.51,227.86 2286.41,229.51 2232.03,283.89 2230.37,285 2228.42,285.39 1898.27,285.39 1896.32,285 1894.66,283.89 1817.07,206.3 1772.97,206.3 1584.83,394.45 1583.17,395.55 1581.22,395.94 1139.1,395.94 1137.15,395.55 1135.5,394.45 1085.65,344.6 1078.15,337.1 832.28,337.1 773.1,396.28 773.1,495.14 772.71,497.1 771.6,498.75 624.94,645.42 623.28,646.52 621.33,646.91 307.59,646.91 275.25,679.25 275.25,767.3 2502.94,767.3

## Keep-outs
KeepOutLayer:
  the board outline again, w10

## Other copper
PWR (plane layer: these items are gaps in the copper):
  lines w10: 407.1,787.4 270.15,787.4 270.15,677.14 305.48,641.81 621.33,641.81 768,495.14 768,394.17 830.17,332 1080.26,332 1089.25,340.99 1139.1,390.84 1386.84,390.84 1581.22,390.84 1770.86,201.2 1819.18,201.2 1898.27,280.29 2228.42,280.29 2282.8,225.91 2282.8,93.59 2302.96,73.43 2634.03,73.43 2678.74,118.14 2678.74,216.59 2637.34,258 2538.43,258 2508.04,288.39 2508.04,785.04 ; 2210.24,0 2210.24,34.4

## Silkscreen, mask and mechanical layers (free items; w line width, h text height)
TopOverlay:
  circle w10: c1244,736.39 r11.04
  text "UART" at 1478.92,731.11 h30
  text "SWD" at 1306.41,717.67 h30
  text "MCORD AFE v1.2" at 2725,208 h30 r90
BottomOverlay:
  text "CAN" at 409.29,738 h30
  text "GND" at 2548.14,727.91 h30
  text "3V3" at 2715.55,727.91 h30
  text "GND" at 1743.35,681.15 h30
  text "L" at 477.06,631.28 h30
  text "H" at 435.77,609 h30
  text "Rx" at 1667.01,592.46 h30
  text "Tx" at 1655.84,504.43 h30
  text "TIA" at 624.51,456.38 h30
  text "MCORD AFE v1.1" at 1523,53 h30
BottomSolder:
  lines w19.68: 966.33,505.41 cw(c964.91,505.95) 966.35,506.46 ; 966.33,548.71 cw(c964.91,549.26) 966.35,549.77 ; 966.33,592.02 cw(c964.91,592.57) 966.35,593.07 ; 966.33,635.33 cw(c964.91,635.87) 966.35,636.38 ; 966.33,678.63 cw(c964.91,679.18) 966.35,679.69 ; 1009.64,505.91 cw(c1008.21,506.46) 1009.66,506.96 ; 1009.64,549.22 cw(c1008.21,549.77) 1009.66,550.27 ; 1009.64,592.53 cw(c1008.21,593.07) 1009.66,593.58 ; 1009.64,635.83 cw(c1008.21,636.38) 1009.66,636.89 ; 1009.64,679.14 cw(c1008.21,679.69) 1009.66,680.19 ; 1052.95,505.41 cw(c1051.52,505.95) 1052.96,506.46 ; 1052.95,548.71 cw(c1051.52,549.26) 1052.96,549.77 ; 1052.95,592.02 cw(c1051.52,592.57) 1052.96,593.07 ; 1052.95,635.33 cw(c1051.52,635.87) 1052.96,636.38 ; 1052.95,678.63 cw(c1051.52,679.18) 1052.96,679.69 ; 1096.26,505.41 cw(c1094.83,505.95) 1096.27,506.46 ; 1096.26,548.71 cw(c1094.83,549.26) 1096.27,549.77 ; 1096.26,592.02 cw(c1094.83,592.57) 1096.27,593.07 ; 1096.26,635.33 cw(c1094.83,635.87) 1096.27,636.38 ; 1096.26,678.63 cw(c1094.83,679.18) 1096.27,679.69 ; 1139.56,505.41 cw(c1138.13,505.95) 1139.58,506.46 ; 1139.56,548.71 cw(c1138.13,549.26) 1139.58,549.77 ; 1139.56,592.02 cw(c1138.13,592.57) 1139.58,593.07 ; 1139.56,635.33 cw(c1138.13,635.87) 1139.58,636.38 ; 1139.56,678.63 cw(c1138.13,679.18) 1139.58,679.69 ; 1677.25,449.55 cw(c1675.83,450.1) 1677.27,450.61 ; 1677.25,503.89 cw(c1675.83,504.43) 1677.27,504.94 ; 1706.39,476.72 cw(c1704.96,477.27) 1706.4,477.77 ; 1735.52,449.55 cw(c1734.09,450.1) 1735.54,450.61 ; 1735.52,503.89 cw(c1734.09,504.43) 1735.54,504.94 ; 2103.04,450.18 cw(c2101.61,450.73) 2103.06,451.24 ; 2103.04,504.52 cw(c2101.61,505.06) 2103.06,505.57 ; 2132.18,477.35 cw(c2130.75,477.9) 2132.19,478.4 ; 2161.31,450.18 cw(c2159.88,450.73) 2161.33,451.24 ; 2161.31,504.52 cw(c2159.88,505.06) 2161.33,505.57 ; 2344.42,142.1 cw(c2342.99,142.65) 2344.43,143.16 ; 2344.42,193.17 cw(c2342.99,193.72) 2344.43,194.22 ; 2366,166.37 cw(c2367.53,166.37) 2368.97,166.88 ; 2392.22,142.15 ccw(c2393.99,142.65) 2392.23,143.2 ; 2395.42,193.17 cw(c2393.99,193.72) 2395.43,194.22
Mechanical1:
  the board outline again, w10

## Dimensions
0,0 to 2755.91,39.37 on Mechanical2
0,-59.06 to 2125.98,118.11 on Mechanical2
0,0 to 629.92,118.11 on Mechanical2